# EAGLE board Commlink_Interface_V4_Portrait (EAGLE 6.5.0)
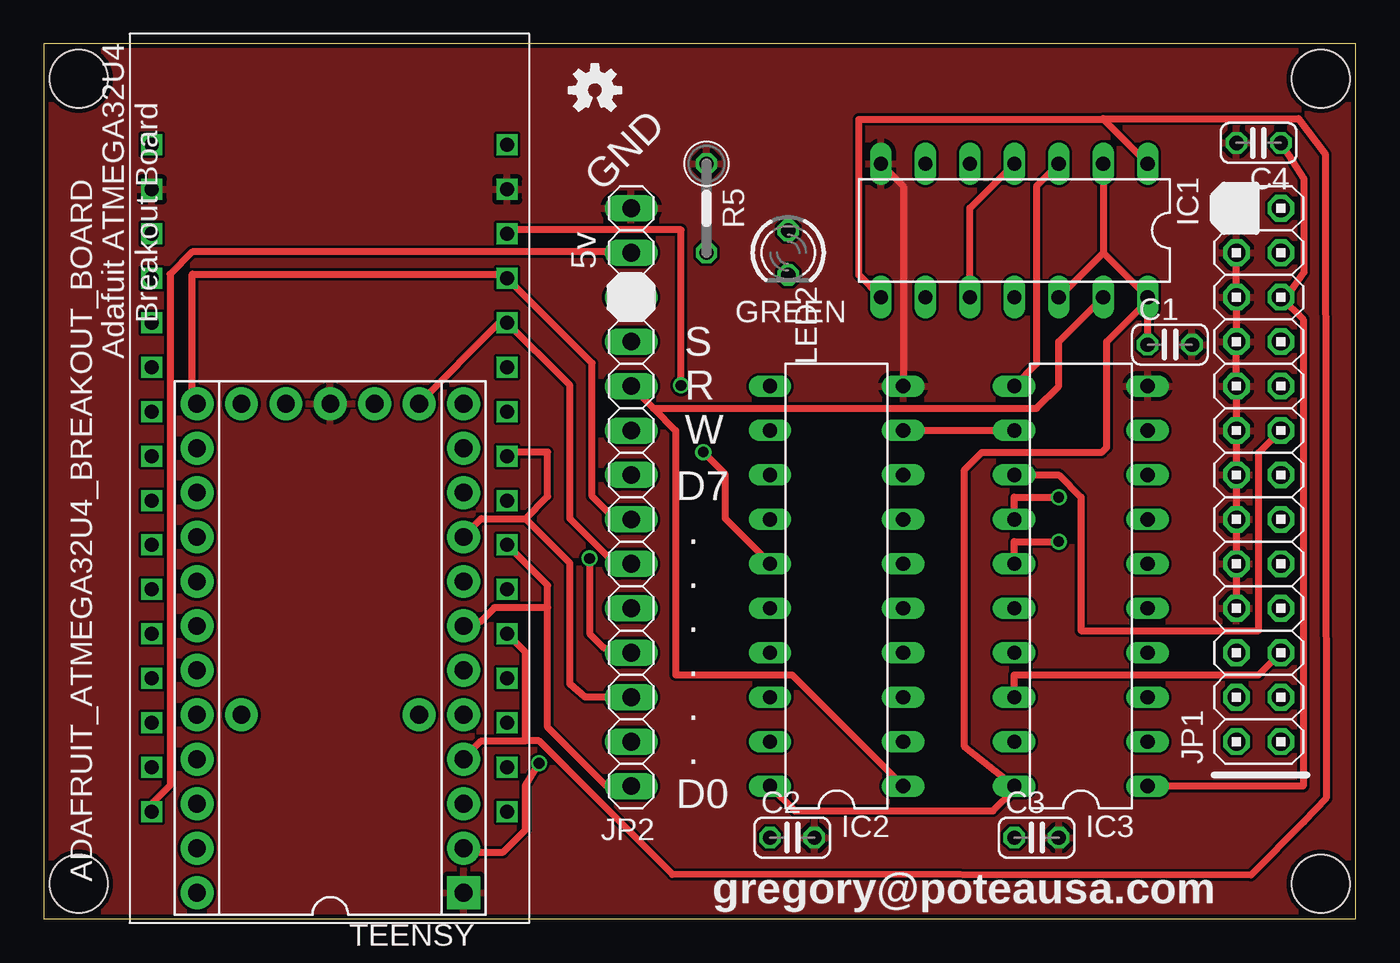
[diagram p0: board, top side]
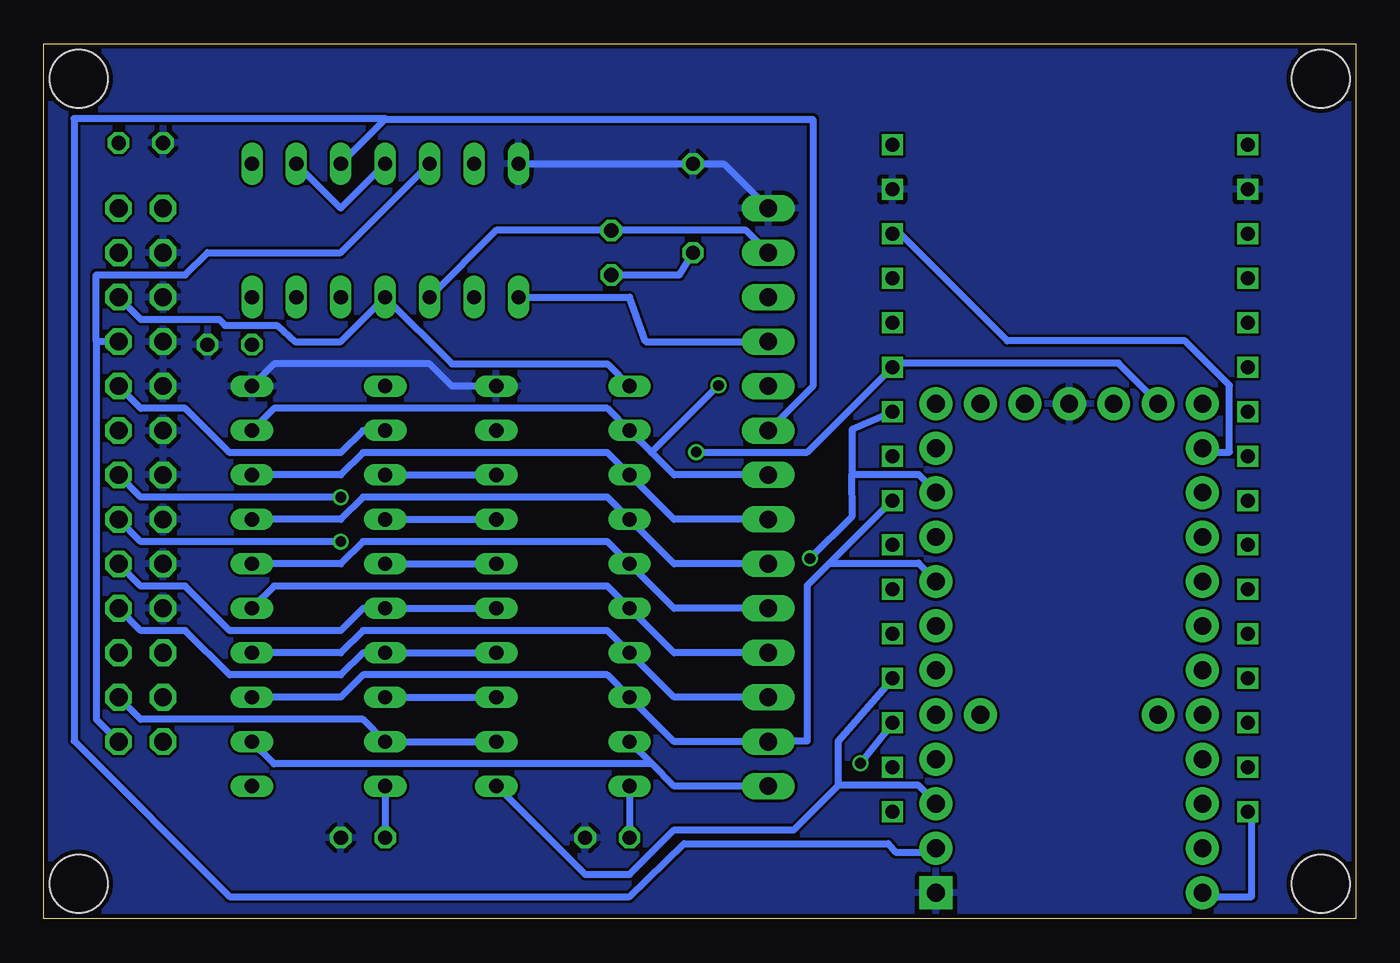
[diagram p1: board, bottom side, seen from below]

Size 75 x 50 mm. Coordinates in mm from the lower left corner, seen from the top.
Outline: 0,0 75,0 75,50 0,50 0,0
Copper layers (1*2*15*16): Top 0.035mm / dielectric 0.2mm / Route2 0.0175mm / dielectric 1.1mm / Route15 0.0175mm / dielectric 0.2mm / Bottom 0.035mm
Design rules "SeeedStudio_DRU_no_angle_20130527": minimum track width 6mil, minimum drill 12mil, track to track 6mil, track to pad 6mil, pad to pad 6mil, via to via 6mil, smd to smd 0mil, copper to edge 10mil, drill to drill 10mil, minimum pad ring 6mil, minimum via ring 6mil, stop-mask expansion 2mil, vias tented up to drill 25mil, thermal gap 10mil

## Footprints (pad centres in the part's own frame; a part is rotated, then mirrored left to right if it is on the bottom)
ATMEGA32U4BREAKOUT = drill 0.8 square: 3V -10.16,19.05; 5V 10.16,19.05; A 10.16,16.51; B0 -10.16,13.97; B1 -10.16,11.43; B2 -10.16,8.89; B3 -10.16,6.35; B4 10.16,-13.97; B5 10.16,-11.43; B6 10.16,-8.89; B7 10.16,-6.35; C6 10.16,-3.81; C7 10.16,-1.27; D0 -10.16,3.81; D1 -10.16,1.27; D2 -10.16,-1.27; D3 -10.16,-3.81; D4 -10.16,-6.35; D5 -10.16,-8.89; D6 -10.16,-11.43; D7 -10.16,-13.97; E6 -10.16,16.51; F0 10.16,13.97; F1 10.16,11.43; F4 10.16,8.89; F5 10.16,6.35; F6 10.16,3.81; F7 10.16,1.27; GND -10.16,-16.51; GND2 10.16,-16.51; RST -10.16,-19.05; VCC 10.16,-19.05
C025-024X044 = drill 0.813 octagon: 1 -1.27,0; 2 1.27,0
STAND-OFF = hole 3.302: 0,0
DIL14 = drill 0.813 long: 1 -7.62,-3.81; 2 -5.08,-3.81; 3 -2.54,-3.81; 4 0,-3.81; 5 2.54,-3.81; 6 5.08,-3.81; 7 7.62,-3.81; 8 7.62,3.81; 9 5.08,3.81; 10 2.54,3.81; 11 0,3.81; 12 -2.54,3.81; 13 -5.08,3.81; 14 -7.62,3.81
DIL20 = drill 0.813 long: 1 -11.43,-3.81; 2 -8.89,-3.81; 3 -6.35,-3.81; 4 -3.81,-3.81; 5 -1.27,-3.81; 6 1.27,-3.81; 7 3.81,-3.81; 8 6.35,-3.81; 9 8.89,-3.81; 10 11.43,-3.81; 11 11.43,3.81; 12 8.89,3.81; 13 6.35,3.81; 14 3.81,3.81; 15 1.27,3.81; 16 -1.27,3.81; 17 -3.81,3.81; 18 -6.35,3.81; 19 -8.89,3.81; 20 -11.43,3.81
2X13 = drill 1.016 octagon: 1 -15.24,-1.27; 2 -15.24,1.27; 3 -12.7,-1.27; 4 -12.7,1.27; 5 -10.16,-1.27; 6 -10.16,1.27; 7 -7.62,-1.27; 8 -7.62,1.27; 9 -5.08,-1.27; 10 -5.08,1.27; 11 -2.54,-1.27; 12 -2.54,1.27; 13 0,-1.27; 14 0,1.27; 15 2.54,-1.27; 16 2.54,1.27; 17 5.08,-1.27; 18 5.08,1.27; 19 7.62,-1.27; 20 7.62,1.27; 21 10.16,-1.27; 22 10.16,1.27; 23 12.7,-1.27; 24 12.7,1.27; 25 15.24,-1.27; 26 15.24,1.27
1X14 = drill 1.016 long: 1 -16.51,0; 2 -13.97,0; 3 -11.43,0; 4 -8.89,0; 5 -6.35,0; 6 -3.81,0; 7 -1.27,0; 8 1.27,0; 9 3.81,0; 10 6.35,0; 11 8.89,0; 12 11.43,0; 13 13.97,0; 14 16.51,0
LED3MM = drill 0.813 octagon: A -1.27,0; K 1.27,0
0207/5V = drill 0.813 octagon: 1 -2.54,0; 2 2.54,0
TEENSY = drill 1.016 pad 1.88: 5V2 13.97,-2.54; +5V -13.97,7.62; B0 -11.43,-7.62; B1 -8.89,-7.62; B2 -6.35,-7.62; B3 -3.81,-7.62; B4 8.89,7.62; B5 6.35,7.62; B6 3.81,7.62; B7 -1.27,-7.62; C6 11.43,-7.62; C7 13.97,-7.62; D0 1.27,-7.62; D1 3.81,-7.62; D2 6.35,-7.62; D3 8.89,-7.62; D4 13.97,5.08; D5 13.97,-5.08; D6 13.97,7.62; D7 11.43,7.62; E6 -3.81,-5.08; F0 -11.43,7.62; F1 -8.89,7.62; F4 -6.35,7.62; F5 -3.81,7.62; F6 -1.27,7.62; F7 1.27,7.62; GRND1 13.97,0; REF -3.81,5.08; RST 13.97,2.54 | drill 1.016 pad 1.88 square: GND -13.97,-7.62

## Placement (x,y rotation side)
ADAFRUIT_ATMEGA32U4_BREAKOUT_BOARD  Adafruit ATMEGA32U4  [ATMEGA32U4BREAKOUT]  16.33,25.17 180 top
C1  0.1uf  [C025-024X044]  64.37,32.81 0 top
C2  0.1uf  [C025-024X044]  42.78,4.63 0 top
C3  0.1uf  [C025-024X044]  56.75,4.63 0 top
C4  180pf  [C025-024X044]  69.45,44.33 180 top
H1  [STAND-OFF]  2,48 0 top
H2  [STAND-OFF]  73,48 0 top
H3  [STAND-OFF]  73,2 0 top
H4  [STAND-OFF]  2,2 0 top
IC1  74LS74N  [DIL14]  55.48,39.33 180 top
IC2  74AS573N  [DIL20]  45.32,19.01 90 top
IC3  74AS573N  [DIL20]  59.29,19.01 90 top
JP1  PAR's DB25  [2X13]  69.45,25.36 90 top
JP2  PC  [1X14]  33.58,24.09 90 top
LED2  GREEN  [LED3MM]  42.56,38.06 270 top
LOGO_OPEN_HARDWARE  [OSHW-LOGO-S]  31.5,47.34 0 top
R5  470  [0207/5V]  37.89,40.6 270 top
TEENSY  TEENSY 2.0  [TEENSY]  16.38,15.46 90 top

## Library data of the parts
ADAFRUIT_ATMEGA32U4_BREAKOUT_BOARD = atmega32u4breakout
C1-C4 R5 = rcl
H1-H4 = SparkFun
IC1-IC3 = 74xx-us
JP1 JP2 = pinhead
LED2 = led
LOGO_OPEN_HARDWARE = SparkFun-Aesthetics
TEENSY = teensy

## Nets
GND: ADAFRUIT_ATMEGA32U4_BREAKOUT_BOARD.GND ADAFRUIT_ATMEGA32U4_BREAKOUT_BOARD.GND2 C1.2 C2.2 C3.2 C4.2 IC1.7 IC2.10 IC3.10 JP1.8 JP1.10 JP1.12 JP1.14 JP1.16 JP1.18 JP1.20 JP1.22 JP1.24 JP2.14 R5.1 TEENSY.GND TEENSY.GRND1
N$2: LED2.K R5.2
N$10: IC2.3 IC3.18 JP1.5
N$11: IC2.4 IC3.17 JP1.7
N$12: IC2.5 IC3.16 JP1.9
N$13: IC2.6 IC3.15 JP1.11
N$14: IC2.7 IC3.14 JP1.13
N$15: IC2.8 IC3.13 JP1.15
N$17: IC2.2 IC3.19 JP1.3
N$18: IC2.9 IC3.12 JP1.17
PAR_ACK: C4.1 IC1.11 IC2.11 IC3.1 JP1.21
PAR_STB: IC1.5 JP1.1 JP1.19
PC_D0: ADAFRUIT_ATMEGA32U4_BREAKOUT_BOARD.D0 IC2.19 IC3.2 JP2.1 TEENSY.D0
PC_D1: ADAFRUIT_ATMEGA32U4_BREAKOUT_BOARD.D1 IC2.18 IC3.3 JP2.2 TEENSY.D1
PC_D2: ADAFRUIT_ATMEGA32U4_BREAKOUT_BOARD.D2 IC2.17 IC3.4 JP2.3 TEENSY.D2
PC_D3: ADAFRUIT_ATMEGA32U4_BREAKOUT_BOARD.D3 IC2.16 IC3.5 JP2.4 TEENSY.D3
PC_D4: ADAFRUIT_ATMEGA32U4_BREAKOUT_BOARD.D4 IC2.15 IC3.6 JP2.5 TEENSY.D4
PC_D5: ADAFRUIT_ATMEGA32U4_BREAKOUT_BOARD.D5 IC2.14 IC3.7 JP2.6 TEENSY.D5
PC_D6: ADAFRUIT_ATMEGA32U4_BREAKOUT_BOARD.D6 IC2.13 IC3.8 JP2.7 TEENSY.D6
PC_D7: ADAFRUIT_ATMEGA32U4_BREAKOUT_BOARD.D7 IC2.12 IC3.9 JP2.8 TEENSY.D7
PCRD#: ADAFRUIT_ATMEGA32U4_BREAKOUT_BOARD.B1 IC1.13 IC2.1 JP2.10 TEENSY.B1
PCWR: ADAFRUIT_ATMEGA32U4_BREAKOUT_BOARD.B0 IC1.3 IC3.11 JP2.9 TEENSY.B0
STATUS: ADAFRUIT_ATMEGA32U4_BREAKOUT_BOARD.B2 IC1.1 IC1.8 JP2.11 TEENSY.B2
VCC: ADAFRUIT_ATMEGA32U4_BREAKOUT_BOARD.5V C1.1 C2.1 C3.1 IC1.2 IC1.4 IC1.10 IC1.12 IC1.14 IC2.20 IC3.20 JP2.13 LED2.A TEENSY.+5V

## Tracks (layer width: path | path; a pad name or v marks a point on that pad's centre or on a via)
GND
  Top 0.406: JP1.8 JP1.10 JP1.12 JP1.14 JP1.16 JP1.18 JP1.20 JP1.22 JP1.24 | IC2.10 49.13,41.87 IC1.7
  Bottom 0.406: JP2.14 36.12,43.14 R5.1 IC1.7 | IC3.10 61.83,31.71 52.94,31.71 51.67,30.44 IC2.10
  pour Bottom: 0,50 75,50 75,0 0,0
  pour Top: 0,50 75,50 75,0 0,0
N$2
  Bottom 0.406: R5.2 38.66,36.79 LED2.K
N$10
  Top 0.406: JP1.5 69.45,13.93 55.48,13.93 IC3.18
  Bottom 0.406: IC3.18 IC2.3
N$11
  Bottom 0.406: IC2.4 IC3.17 56.75,15.2 58.02,13.93 64.37,13.93 66.91,16.47 69.45,16.47 JP1.7
N$12
  Bottom 0.406: IC2.5 IC3.16 56.75,17.74 58.02,16.47 64.37,16.47 66.91,19.01 69.45,19.01 JP1.9
N$13  (via drill 0.61)
  Top 0.406: v58.02,21.55 55.48,21.55 IC3.15
  Bottom 0.406: IC3.15 IC2.6 | JP1.11 69.45,21.55 v58.02,21.55
N$14  (via drill 0.61)
  Top 0.406: v58.02,24.09 55.48,24.09 IC3.14
  Bottom 0.406: IC3.14 IC2.7 | JP1.13 69.45,24.09 v58.02,24.09
N$15
  Top 0.406: JP1.15 69.45,26.63 69.45,16.47 59.29,16.47 59.29,24.09 58.02,25.36 IC3.13
  Bottom 0.406: IC3.13 IC2.8
N$17
  Bottom 0.406: IC2.2 IC3.19 56.75,11.39 69.45,11.39 JP1.3
N$18
  Top 0.406: IC3.12 IC2.9
  Bottom 0.406: JP1.17 69.45,29.17 66.91,29.17 64.37,26.63 58.02,26.63 56.75,27.9 IC3.12
PAR_ACK
  Top 0.406: IC3.1 71.99,7.58 71.99,34.25 JP1.21 71.03,35.52 72.04,36.94 72.04,42.28 C4.1
  Bottom 0.406: IC2.11 42.78,31.71 51.67,31.71 IC1.11 58.02,32.98 60.64,32.98 61.67,33.91 64.63,33.91 64.97,34.25 69.45,34.25 JP1.21
PAR_STB
  Bottom 0.406: IC1.5 58.02,38.06 65.64,38.06 66.91,36.79 71.99,36.79 71.99,32.98 | JP1.19 71.99,32.98 | JP1.1 71.99,11.39 71.99,32.98
PC_D0
  Top 0.406: 28.81,17.78 28.81,10.93 32.12,7.62 JP2.1 | 28.81,17.78 28.81,19.05 26.27,21.59 ADAFRUIT_ATMEGA32U4_BREAKOUT_BOARD.D0 | 28.81,17.78 25.77,17.78 25,17.01 23.73,16.51 TEENSY.D0
  Bottom 0.406: 40.24,8.85 38.97,7.58 JP2.1 | 40.24,8.85 IC2.19 | IC3.2 61.83,8.85 40.24,8.85
PC_D1
  Bottom 0.406: IC3.3 58.02,12.66 56.75,13.93 42.78,13.93 IC2.18 38.97,10.12 JP2.2 32.62,10.16 31.35,10.16 31.35,19.05 30.08,20.32 | 30.08,20.32 26.27,24.13 ADAFRUIT_ATMEGA32U4_BREAKOUT_BOARD.D1 | 30.08,20.32 25,20.32 23.73,19.05 TEENSY.D1
PC_D2
  Top 0.406: 27.54,22.86 28.81,24.13 28.81,26.67 26.27,26.67 ADAFRUIT_ATMEGA32U4_BREAKOUT_BOARD.D2 | 27.54,22.86 25,22.86 23.73,21.59 TEENSY.D2 | 27.54,22.86 30.08,20.32 30.08,13.42 30.96,12.66 JP2.3
  Bottom 0.406: JP2.3 38.97,12.66 IC2.17 42.78,16.47 56.75,16.47 58.02,15.2 IC3.4
PC_D3  (via drill 0.61)
  Top 0.406: 41.51,17.78 IC2.16 | v31.2,20.59 31.2,16.3 32,15.5 JP2.4
  Bottom 0.406: JP2.4 38.97,15.2 IC2.16 42.78,19.01 61.83,19.01 IC3.5 | 28.81,25.4 25,25.4 23.73,24.13 TEENSY.D3 | 28.81,25.4 28.78,23.01 v31.2,20.59 | ADAFRUIT_ATMEGA32U4_BREAKOUT_BOARD.D3 28.8,27.96 28.81,25.4
PC_D4  (via drill 0.61)
  Top 0.406: v37.7,26.67 38.97,25.4 38.97,22.86 41.51,20.32 IC2.15
  Bottom 0.406: JP2.5 38.97,17.74 IC2.15 42.78,21.55 56.75,21.55 58.02,20.28 IC3.6 | 26.27,31.75 13.57,31.75 11.03,29.21 TEENSY.D4 | 26.27,31.75 31.35,26.67 v37.7,26.67 | 26.27,31.75 ADAFRUIT_ATMEGA32U4_BREAKOUT_BOARD.D4
PC_D5
  Top 0.406: 26.27,34.29 21.19,29.21 TEENSY.D5 | 26.27,34.29 30.08,30.48 30.08,22.86 32.62,20.32 JP2.6 | 26.27,34.29 ADAFRUIT_ATMEGA32U4_BREAKOUT_BOARD.D5
  Bottom 0.406: JP2.6 38.97,20.28 IC2.14 42.78,24.09 56.75,24.09 58.02,22.82 IC3.7
PC_D6
  Top 0.406: 26.27,36.83 8.49,36.83 8.49,29.21 TEENSY.D6 | 26.27,36.83 31.35,31.75 31.35,24.13 32.62,22.86 JP2.7 | 26.27,36.83 ADAFRUIT_ATMEGA32U4_BREAKOUT_BOARD.D6
  Bottom 0.406: JP2.7 38.97,22.82 IC2.13 42.78,26.63 56.75,26.63 58.02,25.36 IC3.8
PC_D7  (via drill 0.61)
  Top 0.406: v36.43,30.48 36.43,39.37 26.27,39.37 ADAFRUIT_ATMEGA32U4_BREAKOUT_BOARD.D7
  Bottom 0.406: 40.26,26.65 38.97,25.36 JP2.8 | 40.26,26.65 IC2.12 42.78,29.17 61.83,29.17 IC3.9 | ADAFRUIT_ATMEGA32U4_BREAKOUT_BOARD.D7 26.27,39.37 19.92,33.02 9.76,33.02 7.22,30.48 7.22,26.67 8.49,26.67 TEENSY.D7 | 40.26,26.65 v36.43,30.48
PCRD#
  Top 0.406: IC2.1 42.78,13.93 36.12,13.93 36.12,27.9 34.85,29.17 | JP2.10 34.85,29.17 | IC1.13 58.02,32.98 58.02,30.44 56.75,29.17 34.85,29.17
  Bottom 0.406: 29.58,7.62 29.58,10.16 26.27,13.97 ADAFRUIT_ATMEGA32U4_BREAKOUT_BOARD.B1 | 29.58,7.62 25,7.62 23.73,6.35 TEENSY.B1 | 29.58,7.62 32.12,5.08 38.97,5.08 41.51,2.54 44.05,2.54 49.13,7.62 IC2.1
PCWR  (via drill 0.61)
  Top 0.406: IC3.11 56.75,31.71 56.75,41.87 IC1.3 | v28.31,8.89 27.54,7.62 27.54,5.08 26.27,3.81 23.73,3.81 TEENSY.B0
  Bottom 0.406: JP2.9 31.04,30.44 31.04,45.68 55.48,45.68 | IC1.3 55.48,45.68 | v28.31,8.89 26.27,11.43 ADAFRUIT_ATMEGA32U4_BREAKOUT_BOARD.B0 | TEENSY.B0 23.73,3.81 26.31,3.81 26.72,4.29 38.4,4.29 41.51,1.27 64.37,1.27 73.26,10.16 73.26,45.72 55.48,45.72 55.48,45.68
STATUS
  Top 0.406: 60.56,45.68 IC1.1 | 60.56,45.68 46.59,45.68 46.59,36.79 IC1.8 | 27.54,10.16 27.54,15.24 26.27,16.51 ADAFRUIT_ATMEGA32U4_BREAKOUT_BOARD.B2 | 27.54,10.16 25,10.16 23.73,8.89 TEENSY.B2 | 27.54,10.16 28.31,10.16 35.93,2.54 69,2.5 72.04,5.54 73.31,6.9 73.26,43.68 71.72,45.72 60.56,45.72 60.56,45.68
  Bottom 0.406: IC1.8 41.51,35.52 40.59,32.98 JP2.11
VCC
  Top 0.406: 60.56,38.06 IC1.12 | IC1.2 60.56,38.06 | IC1.4 52.94,40.6 IC1.10 | C1.1 IC1.14 | 60.56,38.06 IC1.14 | IC1.14 63.1,35.32 60.76,32.98 60.76,26.93 60.48,26.66 53.63,26.66 52.63,25.66 52.63,9.81 IC3.20 55.48,7.38 54.26,6.16 42.93,6.16 IC2.20 | 32.11,38.09 JP2.13 32.62,38.1 8.49,38.1 7.22,36.83 7.22,7.62 5.95,6.35 ADAFRUIT_ATMEGA32U4_BREAKOUT_BOARD.5V
  Bottom 0.406: IC1.2 58.02,40.6 IC1.4 | IC1.10 49.13,39.33 LED2.A 34.85,39.33 JP2.13 | IC2.20 C2.1 | IC3.20 C3.1 | ADAFRUIT_ATMEGA32U4_BREAKOUT_BOARD.5V 5.95,6.35 5.95,1.27 8.49,1.27 TEENSY.+5V

## Text on the board
tPlace: GND | 5v | S / R / W | D7 / . / . / . / . / . / . / D0 | gregory@poteausa.com
tNames: Adafuit ATMEGA32U4 / Breakout Board
tValues: Comm Link USB